# EAGLE board Grid (EAGLE 7.3.0)
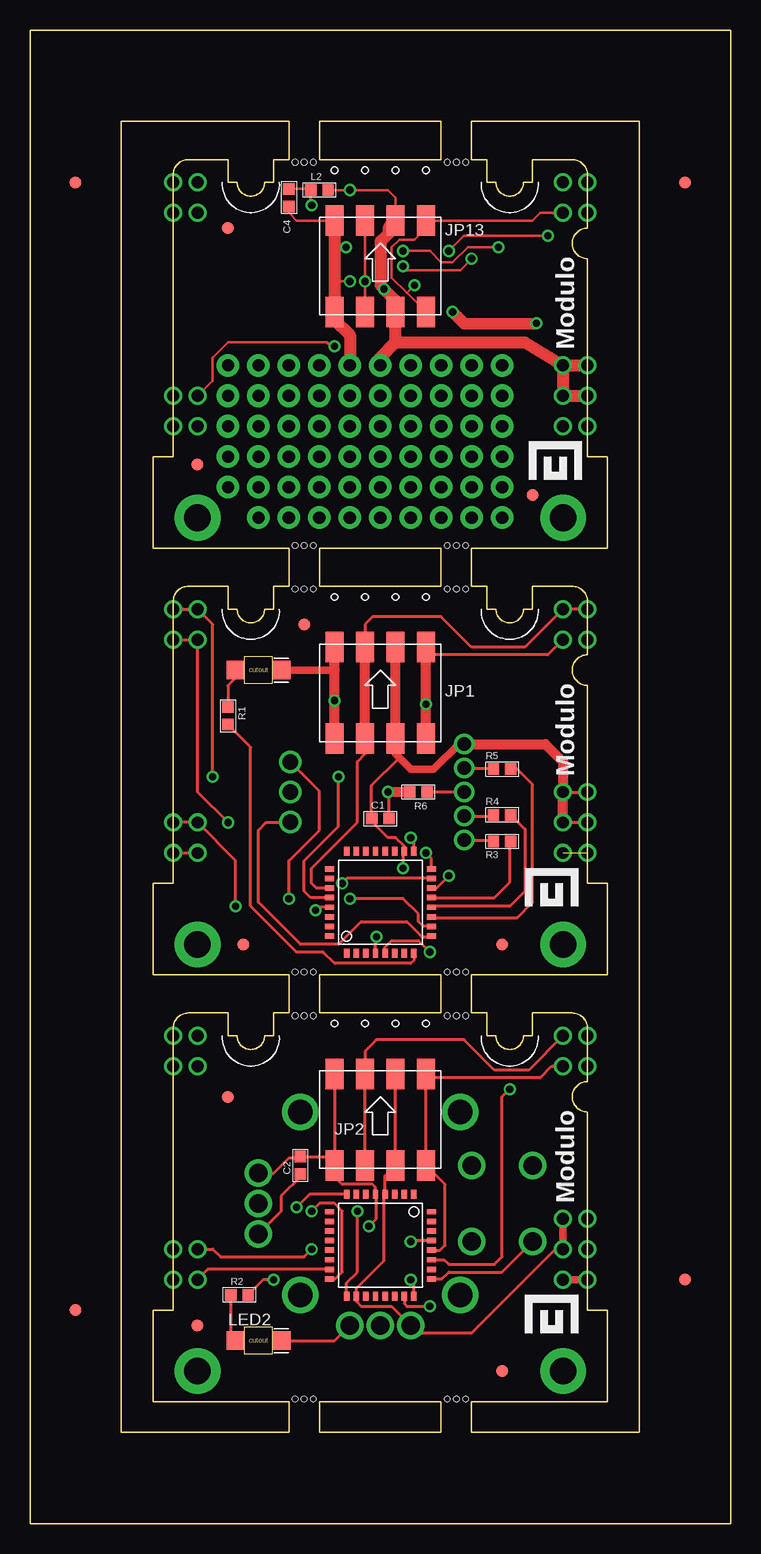
[diagram p0: board, top side]
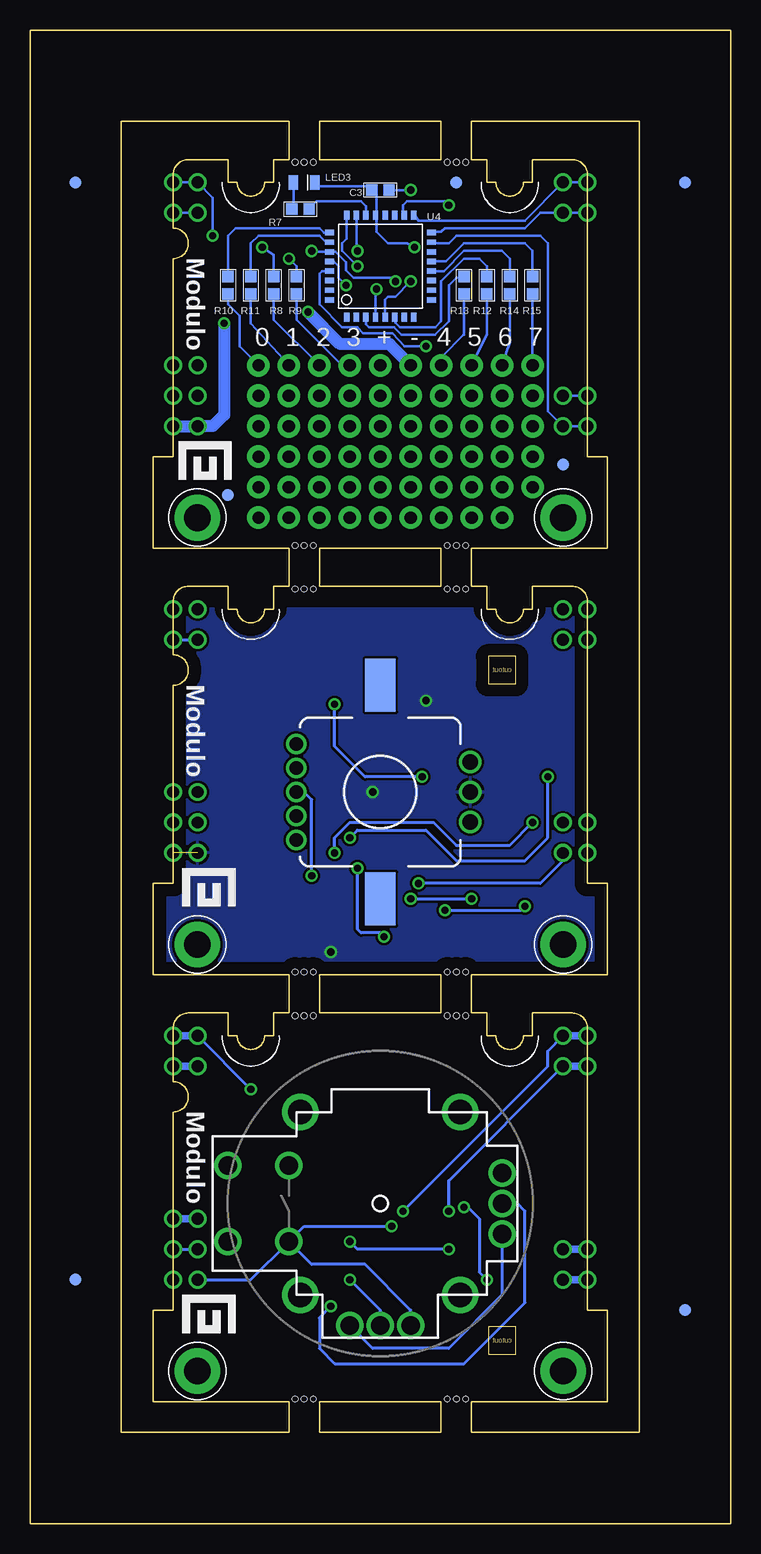
[diagram p1: board, bottom side, seen from below]

Size 58.42 x 124.46 mm. Coordinates in mm from the lower left corner, seen from the top.
Outline: 21.59,10.16 21.59,7.62 7.62,7.62 7.62,116.84 21.59,116.84 21.59,113.66
Outline: 24.13,113.66 24.13,116.84 34.29,116.84 34.29,113.66
Outline: 36.83,113.66 36.83,116.84 50.8,116.84 50.8,7.62 36.83,7.62 36.83,10.16
Outline: 24.13,10.16 24.13,7.62 34.29,7.62 34.29,10.16
Outline: 21.59,81.28 21.59,78.1
Outline: 24.13,78.1 24.13,81.28
Outline: 34.29,81.28 34.29,78.1
Outline: 36.83,78.1 36.83,81.28
Outline: 21.59,45.72 21.59,42.55
Outline: 24.13,42.55 24.13,45.72
Outline: 34.29,42.55 34.29,45.72
Outline: 36.83,42.55 36.83,45.72
Outline: 0,0 58.42,0 58.42,124.46 0,124.46 0,0
Copper layers (1*16): Top 0.035mm / dielectric 1.5mm / Bottom 0.035mm
Design rules "default": minimum track width 10mil, minimum drill 0.6mm, track to track 8mil, track to pad 8mil, pad to pad 8mil, via to via 8mil, smd to smd 8mil, copper to edge 40mil, drill to drill 8mil, minimum pad ring 10mil, minimum via ring 8mil, stop-mask expansion 4mil, vias tented up to drill 0mil, thermal gap 10mil

## Footprints (pad centres in the part's own frame; a part is rotated, then mirrored left to right if it is on the bottom)
0603 = smd 0.95 x 0.95: 1 -0.725,0; 2 0.725,0
FIDUCIAL-1X2 = smd 1 x 1: 1 0,0
AMPMODU-4P = smd 1.524 x 2.54: P$1 -3.81,3.81; P$2 -3.81,-3.81; P$3 -1.27,3.81; P$4 -1.27,-3.81; P$5 1.27,3.81; P$6 1.27,-3.81; P$7 3.81,3.81; P$8 3.81,-3.81
1X05_NO_SILK = drill 1.016 pad 1.88: 1 0,0; 2 2.54,0; 3 5.08,0; 4 7.62,0; 5 10.16,0
1X03_NO_SILK = drill 1.016 pad 1.88: 1 0,0; 2 2.54,0; 3 5.08,0
LED-1206-REV = smd 1.524 x 1.524: A -1.905,0; C 1.9,0
0805-LED = smd 1.2 x 0.8: A 0,-0.9; C 0,0.9
DEVICE-PCB-TABS = drill 0.991: CLK -15.24,30.48; CLK1 -17.272,30.48; GND 15.24,10.16; GND1 17.272,10.16; MISO -15.24,27.94; MISO1 -17.272,27.94; MOSI -15.24,10.16; MOSI1 -17.272,10.16; RESET -15.24,12.7; RESET1 -17.272,12.7; SCL 15.24,27.94; SCL1 17.272,27.94; SDA 15.24,30.48; SDA1 17.272,30.48; VCC 15.24,12.7; VCC1 17.272,12.7; VPROG 17.272,15.24; VPROG1 15.24,15.24 | drill 2.223 pad 3.81: P$1 15.24,2.54; P$2 -15.24,2.54 | hole 0.457: -5.588,32.156; -6.35,32.156; -7.112,32.156; 7.112,32.156; 6.35,32.156; 5.588,32.156; -7.112,0.229; -6.35,0.229; -5.588,0.229; 5.588,0.229; 6.35,0.229; 7.112,0.229
ENCODER_LED_3_SIDEPADS = drill 1.143: 1 -4,7; 2 -2,7; 3 0,7; 4 2,7; 5 4,7 | drill 1.27: A -2.5,-7.5; B 2.5,-7.5; C 0,-7.5 | smd 4.445 x 2.54: P$1 -8.89,0; P$2 8.89,0
JOYSTICK = drill 1.524: B1A -3.175,12.7; B1B 3.175,12.7; B2A -3.175,7.62; B2B 3.175,7.62; H1 -2.54,-10.16; H2 0,-10.16; H3 2.54,-10.16; V1 -10.16,2.54; V2 -10.16,0; V3 -10.16,-2.54 | drill 2.032: MOUNT1 -7.62,6.668; MOUNT2 -7.62,-6.668; MOUNT4 7.62,6.668; MOUNT5 7.62,-6.668
TQFP-32 = smd 0.75 x 0.45: 1 -4.25,2.8; 2 -4.25,2; 3 -4.25,1.2; 4 -4.25,0.4; 5 -4.25,-0.4; 6 -4.25,-1.2; 7 -4.25,-2; 8 -4.25,-2.8; 17 4.25,-2.8; 18 4.25,-2; 19 4.25,-1.2; 20 4.25,-0.4; 21 4.25,0.4; 22 4.25,1.2; 23 4.25,2; 24 4.25,2.8 | smd 0.45 x 0.75: 9 -2.8,-4.25; 10 -2,-4.25; 11 -1.2,-4.25; 12 -0.4,-4.25; 13 0.4,-4.25; 14 1.2,-4.25; 15 2,-4.25; 16 2.8,-4.25; 25 2.8,4.25; 26 2,4.25; 27 1.2,4.25; 28 0.4,4.25; 29 -0.4,4.25; 30 -1.2,4.25; 31 -2,4.25; 32 -2.8,4.25

## Placement (x,y rotation side)
C1  .1uF  [0603]  29.21,58.74 0 top
C2  .1uF  [0603]  22.54,29.84 90 top
C3  .1uF  [0603]  29.21,111.12 180 bottom
C4  .1uF  [0603]  21.59,110.49 90 top
E$1  [FIDUCIAL-1X2]  3.81,17.78 0 top
E$2  [FIDUCIAL-1X2]  54.61,20.32 0 top
E$3  [FIDUCIAL-1X2]  54.61,111.76 0 top
E$4  [FIDUCIAL-1X2]  3.81,111.76 0 top
E$5  [FIDUCIAL-1X2]  3.81,111.76 0 bottom
E$6  [FIDUCIAL-1X2]  54.61,111.76 0 bottom
E$7  [FIDUCIAL-1X2]  54.61,20.32 0 bottom
E$8  [FIDUCIAL-1X2]  3.81,17.78 0 bottom
FID1  FIDUCIAL1X2  [FIDUCIAL-1X2]  13.97,16.51 0 top
FID2  FIDUCIAL1X2  [FIDUCIAL-1X2]  39.37,12.7 0 top
FID3  FIDUCIAL1X2  [FIDUCIAL-1X2]  16.51,35.56 0 top
FID4  FIDUCIAL1X2  [FIDUCIAL-1X2]  17.78,48.26 0 top
FID5  FIDUCIAL1X2  [FIDUCIAL-1X2]  39.37,48.26 0 top
FID6  FIDUCIAL1X2  [FIDUCIAL-1X2]  22.86,74.93 0 top
FID7  FIDUCIAL1X2  [FIDUCIAL-1X2]  13.97,88.27 90 bottom
FID8  FIDUCIAL1X2  [FIDUCIAL-1X2]  22.86,111.76 0 bottom
FID9  FIDUCIAL1X2  [FIDUCIAL-1X2]  41.91,85.72 0 bottom
FID10  FIDUCIAL1X2  [FIDUCIAL-1X2]  13.97,88.27 0 top
FID11  FIDUCIAL1X2  [FIDUCIAL-1X2]  41.91,85.72 0 top
FID12  FIDUCIAL1X2  [FIDUCIAL-1X2]  16.51,107.95 0 top
JP1  HEADER-1X4-AMPMODU  [AMPMODU-4P]  29.21,69.22 0 top
JP2  HEADER-1X4-AMPMODU  [AMPMODU-4P]  29.21,33.66 0 top
JP3  [1X05_NO_SILK]  39.37,96.52 270 top
JP4  [1X05_NO_SILK]  36.83,96.52 270 top
JP5  [1X05_NO_SILK]  34.29,96.52 270 top
JP6  [1X05_NO_SILK]  24.13,96.52 270 top
JP7  [1X05_NO_SILK]  21.59,96.52 270 top
JP8  [1X05_NO_SILK]  19.05,96.52 270 top
JP9  [1X05_NO_SILK]  16.51,96.52 270 top
JP10  [1X05_NO_SILK]  31.75,96.52 270 top
JP11  [1X05_NO_SILK]  29.21,96.52 270 top
JP12  [1X05_NO_SILK]  26.67,96.52 270 top
JP13  HEADER-1X4-AMPMODU  [AMPMODU-4P]  29.21,104.77 0 top
JP14  [1X03_NO_SILK]  19.05,83.82 0 top
JP15  [1X03_NO_SILK]  26.67,83.82 0 top
JP16  [1X03_NO_SILK]  34.29,83.82 0 top
L2  [0603]  24.13,111.12 0 top
LED1  LED-1206-REV  [LED-1206-REV]  19.05,71.12 0 top
LED2  LED-1206-REV  [LED-1206-REV]  19.05,15.24 0 top
LED3  blue  [0805-LED]  35.56,111.76 270 bottom
PCB1  DEVICE-PCB-TABS  [DEVICE-PCB-TABS]  29.21,10.16 0 top
PCB2  DEVICE-PCB-TABS  [DEVICE-PCB-TABS]  29.21,45.72 0 top
PCB3  DEVICE-PCB-TABS  [DEVICE-PCB-TABS]  29.21,81.28 0 top
R1  681Ω  [0603]  16.51,67.31 270 top
R2  681Ω  [0603]  17.46,19.05 0 top
R3  130  [0603]  39.37,56.83 0 top
R4  68.1Ω  [0603]  39.37,59.06 0 top
R5  68.1Ω  [0603]  39.37,62.86 0 top
R6  10KΩ  [0603]  32.38,60.96 180 top
R7  681Ω  [0603]  35.88,109.54 0 bottom
R8  150Ω  [0603]  38.1,103.19 270 bottom
R9  150Ω  [0603]  36.2,103.19 270 bottom
R10  150Ω  [0603]  41.91,103.19 270 bottom
R11  150Ω  [0603]  40,103.19 270 bottom
R12  150Ω  [0603]  20.32,103.19 270 bottom
R13  150Ω  [0603]  22.23,103.19 270 bottom
R14  150Ω  [0603]  18.41,103.19 270 bottom
R15  150Ω  [0603]  16.51,103.19 270 bottom
SW1  TopUp EC12PLRGBSDVBF-D  [ENCODER_LED_3_SIDEPADS]  29.21,60.96 90 bottom
U1  JOYSTICK  [JOYSTICK]  29.21,26.67 90 bottom
U2  ATTINY48/88-TQFP  [TQFP-32]  29.21,51.75 90 top
U3  ATTINY48/88-TQFP  [TQFP-32]  29.21,23.18 270 top
U4  ATTINY48/88-TQFP  [TQFP-32]  29.21,104.77 90 bottom
U$1  [LOGO-SMALL]  43.18,16.51 0 top
U$2  [LOGO-SMALL]  43.81,16.51 0 bottom
U$3  [LOGO-SMALL]  43.18,52.07 0 top
U$5  [LOGO-SMALL]  43.81,52.07 0 bottom
U$6  [LOGO-SMALL]  43.5,87.63 0 top
U$7  [LOGO-SMALL]  44.13,87.63 0 bottom

## Library data of the parts
C1-C4 = Modulo; PARTNUM: C0603C104K5RACTU
E$1-E$8 FID1-FID12 = SparkFun-Aesthetics
JP1 JP2 JP13 LED1 LED2 R3 SW1 U2-U4 U$1-U$3 U$5-U$7 = Modulo
JP3-JP12 = SparkFun-Connectors; PARTNUM: EXCLUDE
JP14-JP16 = SparkFun-Connectors
L2 = Modulo; PARTNUM: BLM18TG102TN1D
LED3 = Modulo; PARTNUM: LTST-C171TBKT
PCB1 = Modulo; BOARD: Joystick; NOBOM: 1; VERSION: 2
PCB2 = Modulo; BOARD: Knob; NOBOM: 1; VERSION: 4
PCB3 = Modulo; BOARD: Blank Slate; VERSION: v2
R1 R2 R7 = Modulo; PARTNUM: ERJ-3EKF6810V
R4 R5 = Modulo; PARTNUM: ERJ-3EKF68R1V
R6 = Modulo; PARTNUM: ERJ-3EKF1002V
R8-R15 = Modulo; PARTNUM: ERJ-3EKF1500V
U1 = Modulo; PARTNUM: https://www.sparkfun.com/products/9032

## Nets
A: SW1.A U2.9
B: SW1.B U2.10
BLUE: R5.2 U2.11
GND: C2.2 JP2.P$1 JP2.P$2 LED2.C PCB1.GND PCB1.GND1 U1.B2A U1.H3 U1.V3 U3.5
GND1: C1.2 JP1.P$1 JP1.P$2 LED1.C PCB2.GND PCB2.GND1 R6.2 SW1.C U2.5
GND2: C3.2 C4.1 JP12.1 JP13.P$1 JP13.P$2 LED3.C PCB3.GND PCB3.GND1 U4.5 U4.21
GREEN: R4.2 U2.12
H: U1.H2 U3.23
IO0: R10.1 U4.25
IO1: R11.1 U4.26
IO2: R8.1 U4.23
IO3: R9.1 U4.24
IO4: R13.1 U4.3
IO5: R12.1 U4.6
IO6: R14.1 U4.12
IO7: R15.1 U4.13
LED: R2.2 U3.8
LED1: R1.2 U2.8
LED2: R7.2 U4.22
MISO: PCB1.MISO PCB1.MISO1 U3.16
MISO1: PCB2.MISO PCB2.MISO1 U2.16
MISO2: PCB3.MISO PCB3.MISO1 U4.16
MOSI: PCB1.MOSI PCB1.MOSI1 U3.15
MOSI1: PCB2.MOSI PCB2.MOSI1 U2.15
MOSI2: PCB3.MOSI PCB3.MOSI1 U4.15
N$1: LED2.A R2.1
N$2: U2.21
N$3: LED3.A R7.1
N$4: R3.1 SW1.1
N$5: R4.1 SW1.2
N$6: R5.1 SW1.4
N$7: LED1.A R1.1
N$8: U3.21
N$9: JP5.1 R8.2
N$10: JP10.1 R9.2
N$11: JP3.1 R10.2
N$12: JP4.1 R11.2
N$13: JP6.1 R13.2
N$14: JP7.1 R12.2
N$15: JP9.1 R15.2
N$16: JP8.1 R14.2
N$17: C4.2 L2.1 U4.18
RED: R3.2 U2.13
RESET: PCB1.RESET PCB1.RESET1 U3.29
RESET1: PCB2.RESET PCB2.RESET1 U2.29
RESET2: PCB3.RESET PCB3.RESET1 U4.29
SCK: PCB1.CLK PCB1.CLK1 U3.17
SCK1: PCB2.CLK PCB2.CLK1 U2.17
SCK2: PCB3.CLK PCB3.CLK1 U4.17
SCL: JP2.P$7 JP2.P$8 PCB1.SCL PCB1.SCL1 U3.28
SCL1: JP1.P$7 JP1.P$8 PCB2.SCL PCB2.SCL1 U2.28
SCL2: JP13.P$7 JP13.P$8 PCB3.SCL PCB3.SCL1 U4.28
SDA: JP2.P$3 JP2.P$4 PCB1.SDA PCB1.SDA1 U3.27
SDA1: JP1.P$3 JP1.P$4 PCB2.SDA PCB2.SDA1 U2.27
SDA2: JP13.P$3 JP13.P$4 PCB3.SDA PCB3.SDA1 U4.27
SEL: U1.B1A U3.25
SW: R6.1 SW1.3 U2.14
V: U1.V2 U3.24
VCC: C2.1 JP2.P$5 JP2.P$6 PCB1.VCC PCB1.VCC1 PCB1.VPROG PCB1.VPROG1 U1.H1 U1.V1 U3.4 U3.18
VCC1: C1.1 JP1.P$5 JP1.P$6 PCB2.VCC PCB2.VCC1 PCB2.VPROG PCB2.VPROG1 SW1.5 U2.4 U2.18
VCC2: C3.1 JP11.1 JP13.P$5 JP13.P$6 L2.2 PCB3.VCC PCB3.VCC1 PCB3.VPROG PCB3.VPROG1 U4.4

## Tracks (layer width: path | path; a pad name or v marks a point on that pad's centre or on a via)
A
  Top 0.254: SW1.A 21.67,58.42 19.69,58.42 19.05,57.78 19.05,51.75 22.54,48.26 25.72,48.26 27.62,50.17 31.43,50.17 32.7,48.89 33.4,48.89 U2.9
B  (via drill 0.6)
  Top 0.254: v21.59,52.07 21.59,55.25 24.13,57.78 24.13,61.04 SW1.B | U2.10 32.8,49.75 32.38,50.17 32.38,50.8 31.12,52.07 v26.67,52.07
  Bottom 0.254: v26.67,52.07 v21.59,52.07
BLUE
  Top 0.254: U2.11 33.27,50.55 33.66,50.48 40.64,50.48 41.91,51.75 41.91,61.59 40.64,62.86 R5.2 40,62.86
GND  (via drill 0.6)
  Top 0.254: LED2.C 25.4,15.24 U1.V3 | v28.26,24.77 28.89,25.4 28.89,27.34 U3.5 28.81,28.02 28.57,28.26 26.03,28.26 25.4,28.89 JP2.P$2 | U1.H3 20.32,29.21 21.59,30.48 22.45,30.48 C2.2 24.67,30.57 JP2.P$2 | JP2.P$1 JP2.P$2
  Top 0.61: PCB1.GND PCB1.GND1
  Bottom 0.254: PCB1.GND 40,20.32 U1.B2A | U1.B2A 35.56,24.77 v28.26,24.77 | U1.V3 26.67,17.78 30.48,21.59 34.92,21.59 U1.B2A
GND1  (via drill 0.6)  (1 unrouted)
  Top 0.254: C1.2 29.93,60.87 v29.84,60.96 | U2.5 29.61,48.03 30.16,48.58 32.38,48.58 v33.34,47.62
  Top 0.61: LED1.C 25.4,71.12
  Top 0.813: R6.2 v29.84,60.96 | JP1.P$1 25.4,71.12 v25.4,68.58 JP1.P$2
  pour Bottom: 11.43,45.72 11.43,76.2 46.99,76.2 46.99,45.72
GND2  (via drill 0.6)
  Top 0.203: 25.4,109.54 JP13.P$1 22.23,108.58 21.59,109.22 C4.1 | v26.67,103.5 25.4,103.5 | v26.35,106.36 25.72,106.36 25.4,106.05
  Top 1.016: v35.24,100.97 36.21,99.99 v42.23,100.01 | JP12.1 26.67,99.06 25.4,100.33 JP13.P$2 25.4,103.5 25.4,106.05 JP13.P$1
  Bottom 0.203: U4.5 28.81,102 28.57,102.23 27.94,102.23 v26.67,103.5 | 29.53,109.11 U4.21 | 29.53,109.11 29.53,107.63 28.57,106.68 26.99,106.68 v26.35,106.36 | 29.53,109.11 29.53,110.72 C3.2 30.16,111.44 34.34,111.44 LED3.C
  Bottom 1.016: JP12.1 28.43,98.28 32.55,98.28 v35.24,100.97 | PCB3.GND1 PCB3.GND 43.18,91.44 42.23,92.39 v42.23,100.01
GREEN
  Top 0.254: R4.2 41.27,57.88 41.27,52.7 40,51.44 33.54,51.44 U2.12
H  (via drill 0.6)
  Top 0.254: U3.23 31.21,18.32 31.43,18.1 v33.34,18.1
  Bottom 0.254: v33.34,18.1 34.29,17.14 34.29,14.61 33.02,13.34 22.23,13.34 17.15,18.41 17.15,26.04 17.78,26.67 U1.H2
IO0
  Bottom 0.203: U4.25 33.91,107.58 34.29,107.95 41.27,107.95 41.91,107.31 R10.1
IO1
  Bottom 0.203: U4.26 33.75,106.77 34.29,107.31 39.37,107.31 40,106.68 R11.1
IO2  (via drill 0.6)
  Top 0.203: v39.05,106.36 36.51,106.36 35.24,105.09 34.29,105.09 33.34,106.05 v31.12,106.05
  Bottom 0.203: U4.23 31.21,106.14 v31.12,106.05 | R8.1 38.1,105.73 v39.05,106.36
IO3  (via drill 0.6)
  Top 0.203: v31.12,104.77 31.43,104.46 35.88,104.46 v36.83,105.41
  Bottom 0.203: U4.24 32.01,107.05 32.38,106.68 32.38,106.05 v31.12,104.77 | 36.2,103.5 R9.1 36.2,104.77 v36.83,105.41
IO4
  Bottom 0.203: U4.3 30.41,99.94 30.16,99.69 28.07,99.69 27.43,99.06 24.63,99.06 23.49,100.2 23.49,103.19 22.86,103.82 22.31,103.82 R13.1
IO5
  Bottom 0.203: U4.6 27.94,100.08 27.56,99.69 24.62,99.69 24.13,100.18 24.13,103.5 22.23,105.41 20.95,105.41 20.32,104.77 R12.1
IO6
  Bottom 0.203: U4.12 23.9,104.38 22.23,106.05 19.05,106.05 18.41,105.41 R14.1
IO7
  Bottom 0.203: U4.13 23.73,105.17 22.23,106.68 17.15,106.68 16.51,106.05 R15.1
LED  (via drill 0.6)
  Top 0.254: U3.8 23.3,27.43 v22.23,26.35 | v20.32,20.32 19.46,20.32 R2.2
  Bottom 0.254: v22.23,26.35 21.91,26.35 20.95,25.4 20.95,20.95 v20.32,20.32
LED1
  Top 0.254: R1.2 18.41,64.68 18.41,51.44 22.23,47.62 24.45,47.62 25.4,46.67 31.75,46.67 32.01,46.93 U2.8
LED2
  Bottom 0.203: U4.22 30.41,109.78 30.8,110.17 34.52,110.17 R7.2
MISO  (via drill 0.6)
  Top 0.254: U3.16 25.46,20.38 26.03,20.95 26.03,26.04 25.4,26.67 24.13,26.67 v23.49,26.04
  Bottom 0.254: v23.49,26.04 23.49,28.57 PCB1.MISO
  Bottom 0.61: PCB1.MISO1 PCB1.MISO
MISO1  (via drill 0.6)
  Top 0.254: U2.16 33.46,55.44 v33.02,55.88 | v16.51,58.42 13.97,60.96 PCB2.MISO PCB2.MISO1
  Bottom 0.254: v33.02,55.88 33.02,57.15 31.75,58.42 24.77,58.42 22.86,56.52 18.41,56.52 v16.51,58.42
MISO2
  Bottom 0.203: U4.16 24.45,107.63 24.13,107.63 23.81,107.95 17.15,107.95 15.88,109.22 PCB3.MISO PCB3.MISO1
MOSI
  Top 0.254: U3.15 14.83,21.18 PCB1.MOSI
  Bottom 0.61: PCB1.MOSI PCB1.MOSI1
MOSI1  (via drill 0.6)
  Top 0.254: PCB2.MOSI1 PCB2.MOSI | U2.15 26.45,53.75 v26.03,53.34
  Bottom 0.254: PCB2.MOSI 13.97,55.25 15.88,53.34 v26.03,53.34
MOSI2
  Bottom 0.203: U4.15 24.45,106.68 23.49,106.68 22.86,107.31 15.88,107.31 15.24,106.68 15.24,92.71 PCB3.MOSI PCB3.MOSI1
N$1
  Top 0.254: R2.1 16.74,15.65 LED2.A
N$3
  Bottom 0.203: 36.51,109.63 R7.1 36.46,109.68 LED3.A
N$4
  Top 0.254: SW1.1 38.52,56.96 R3.1
N$5
  Top 0.254: SW1.2 38.55,58.96 R4.1
N$6
  Top 0.254: SW1.4 38.55,62.96 R5.1
N$7
  Top 0.254: LED1.A 17.15,70.48 16.51,69.85 R1.1
N$9
  Bottom 0.203: R8.2 38.1,100.33 JP5.1
N$10
  Bottom 0.203: R9.2 36.2,100.33 32.38,96.52 JP10.1
N$11
  Bottom 0.203: R10.2 41.91,101.6 40.96,100.65 40.96,98.11 JP3.1
N$12
  Bottom 0.203: R11.2 40,100.01 JP4.1
N$13
  Bottom 0.203: R13.2 22.23,99.06 22.26,99.06 24.04,97.28 24.77,96.61 24.9,96.48 JP6.1
N$14
  Bottom 0.203: R12.2 20.32,99.06 JP7.1
N$15
  Bottom 0.203: R15.2 JP9.1
N$16
  Bottom 0.203: R14.2 18.41,98.42 JP8.1
N$17  (via drill 0.6)
  Top 0.203: C4.2 23.31,111.22 L2.1 23.41,109.94 v23.49,109.85
  Bottom 0.203: 27.3,109.12 27.3,109.22 | 27.3,109.22 U4.18 | 27.3,109.22 27.3,109.85 26.99,110.17 23.81,110.17 v23.49,109.85
RED
  Top 0.254: U2.13 38.73,52.15 40,53.42 40,56.74 R3.2
RESET  (via drill 0.6)
  Top 0.254: PCB1.RESET 15.24,22.86 15.88,22.23 22.86,22.23 v23.49,22.86 | U3.29 31.83,23.58 v31.75,23.5
  Bottom 0.254: v23.49,22.86 31.12,22.86 v31.75,23.5
  Bottom 0.61: PCB1.RESET PCB1.RESET1
RESET1  (via drill 0.6)
  Top 0.254: PCB2.RESET1 PCB2.RESET 17.15,55.25 v17.15,51.44 | U2.29 24.05,51.35 v23.81,51.12
  Bottom 0.254: v23.81,51.12 17.46,51.12 v17.15,51.44
RESET2  (via drill 0.6)
  Top 0.203: v25.4,98.11 25.08,98.11 24.77,98.42 16.51,98.42 15.24,97.16 15.24,95.25 PCB3.RESET
  Bottom 0.203: U4.29 34.05,104.38 34.29,104.14 34.29,101.6 32.38,99.69 31.12,99.69 30.63,99.21 28.19,99.21 27.18,98.11 v25.4,98.11 | PCB3.RESET PCB3.RESET1
SCK  (via drill 0.6)
  Top 0.254: U3.17 26.41,20.06 27.3,20.95 v27.3,26.04
  Bottom 0.254: v27.3,26.04 15.24,38.1 15.24,39.37 PCB1.CLK
  Bottom 0.61: PCB1.CLK PCB1.CLK1
SCK1  (via drill 0.6)
  Top 0.254: U2.17 32.01,56.89 v31.75,57.15 | v15.24,62.23 15.24,74.93 PCB2.CLK PCB2.CLK1
  Bottom 0.254: v31.75,57.15 31.12,57.78 25.4,57.78 22.86,55.25 17.15,55.25 15.24,57.15 v15.24,62.23
SCK2
  Bottom 0.203: U4.17 26.35,109.08 26.03,108.58 17.15,108.58 PCB3.CLK PCB3.CLK1
SCL
  Top 0.254: U3.28 34.21,22.78 34.61,23.18 34.61,28.26 JP2.P$8 JP2.P$7 33.34,37.15 42.55,37.15 43.5,38.1 PCB1.SCL
  Bottom 0.61: PCB1.SCL PCB1.SCL1
SCL1  (via drill 0.6)
  Top 0.254: U2.28 23.41,52.15 22.86,52.7 22.86,55.25 25.72,58.1 v25.72,62.23 | v33.02,68.26 33.02,67.31 | PCB2.SCL 43.18,72.39 33.02,72.39
  Top 0.813: JP1.P$8 33.02,67.31 33.02,72.39 JP1.P$7
  Bottom 0.254: v25.72,62.23 30.48,62.23 33.02,64.77 v33.02,68.26 | PCB2.SCL1 PCB2.SCL
SCL2  (via drill 0.6)
  Top 0.203: 31.43,102.55 30.16,103.82 30.16,106.34 30.82,107 32.07,107 33.02,107.95 JP13.P$7 41.91,108.58 42.55,109.22 PCB3.SCL | 31.43,102.55 JP13.P$8 | 31.43,102.55 v32.07,103.19
  Bottom 0.203: U4.28 33.1,105.17 32.7,104.77 32.7,103.82 v32.07,103.19 | PCB3.SCL PCB3.SCL1
SDA  (via drill 0.6)
  Top 0.254: JP2.P$4 JP2.P$3 27.94,39.37 28.89,40.32 36.2,40.32 38.73,37.78 41.59,37.78 PCB1.SDA | U3.27 34.54,21.98 34.92,21.59 38.73,21.59 39.37,22.23 39.37,35.56 v40,36.2
  Bottom 0.254: v40,36.2 PCB1.SDA
  Bottom 0.61: PCB1.SDA PCB1.SDA1
SDA1
  Top 0.254: U2.27 23.88,52.95 23.49,53.34 23.49,54.61 27.3,58.42 27.3,63.5 27.94,64.14 JP1.P$4 | PCB2.SDA1 PCB2.SDA 41.27,73.03 36.83,73.03 34.29,75.56 28.57,75.56 27.94,74.93 JP1.P$3
  Top 0.813: JP1.P$4 JP1.P$3
SDA2  (via drill 0.6)
  Top 0.203: v34.92,106.05 36.2,107.31 v43.18,107.31 | JP13.P$3 v27.94,103.5 JP13.P$4
  Bottom 0.203: v27.94,103.5 28.26,103.82 31.43,103.82 32.07,104.46 32.07,105.09 32.95,105.97 U4.27 34.85,105.97 v34.92,106.05 | PCB3.SDA1 PCB3.SDA 43.18,110.49 v43.18,107.31
SEL
  Top 0.254: U3.25 34.35,20.38 34.92,20.95 39.37,20.95 U1.B1A
SW  (via drill 0.6)
  Top 0.254: R6.1 SW1.3 36.2,60.96 | U2.14 33.9,52.95 v34.92,53.97
  Bottom 0.254: v34.92,53.97 34.92,60.33 35.56,60.96 SW1.3
V  (via drill 0.6)
  Top 0.254: U3.24 32.01,20.06 v31.75,20.32
  Bottom 0.254: U1.V2 29.21,17.78 v31.75,20.32
VCC
  Top 0.254: JP2.P$5 JP2.P$6 29.61,28.98 U3.4 29.53,27.34 29.53,21.91 27.21,19.59 U3.18 27.21,18.51 27.62,18.1 30.16,18.1 U1.V1 32.38,15.88 36.83,15.88 43.81,22.86 PCB1.VCC | C2.1 22.54,28.89 20.95,27.3 20.95,26.04 U1.H1
  Top 0.61: PCB1.VCC PCB1.VPROG1
  Bottom 0.254: PCB1.VCC1 PCB1.VCC | U1.H1 19.05,19.05 23.49,14.61 29.84,14.61 U1.V1
  Bottom 0.61: PCB1.VPROG1 PCB1.VPROG
VCC1  (via drill 0.6)
  Top 0.254: PCB2.VPROG1 PCB2.VPROG | PCB2.VCC PCB2.VCC1 | 30.8,63.82 28.48,61.5 C1.1 28.57,58.65 28.57,58.42 29.84,57.15 30.48,57.15 31.21,56.42 U2.18 31.12,55.91 v31.12,54.61 | U2.4 28.81,48.81 v28.89,48.89
  Top 0.61: SW1.5 35.75,64.96 33.66,62.86 31.75,62.86 30.8,63.82 30.48,64.14 JP1.P$6
  Top 0.813: 44.13,58.42 PCB2.VCC PCB2.VPROG1 44.45,63.5 42.99,64.96 SW1.5 | JP1.P$6 JP1.P$5
  Bottom 0.254: v28.89,48.89 29.21,49.21 30.8,49.21 31.12,49.53 v31.12,54.61
VCC2  (via drill 0.6)
  Top 0.203: 30.48,107.63 JP13.P$5 30.48,110.49 29.84,111.12 v26.67,111.12 L2.2 | 30.48,101.6 JP13.P$6
  Top 1.016: PCB3.VPROG1 PCB3.VPROG | PCB3.VPROG1 PCB3.VCC PCB3.VCC1 | 30.48,98.42 JP13.P$6 | JP11.1 29.21,97.16 30.48,98.42 | 30.48,98.42 41.27,98.42 PCB3.VPROG1 | 30.48,101.6 30.48,101.92 v29.53,102.87 29.53,102.89 29.27,103.16 29.27,106.86 29.94,107.53 29.94,108.05 JP13.P$5
  Bottom 0.203: U4.4 29.61,102.79 v29.53,102.87 | C3.1 v26.67,111.12

## Text on the board
bPlace: 7 | 6 | 5 | 4 | - | + | 3 | 2 | 1 | 0